# Altium PCB AVR_KBD.PcbDoc
Units mil, origin at the board's own origin, x right, y up, seen from the top; angles counter-clockwise.
Board outline 3200 x 1600 mil, 2 copper layers (Top Layer, Bottom Layer); 45 components, 79 nets, 174 pads, 30 vias.
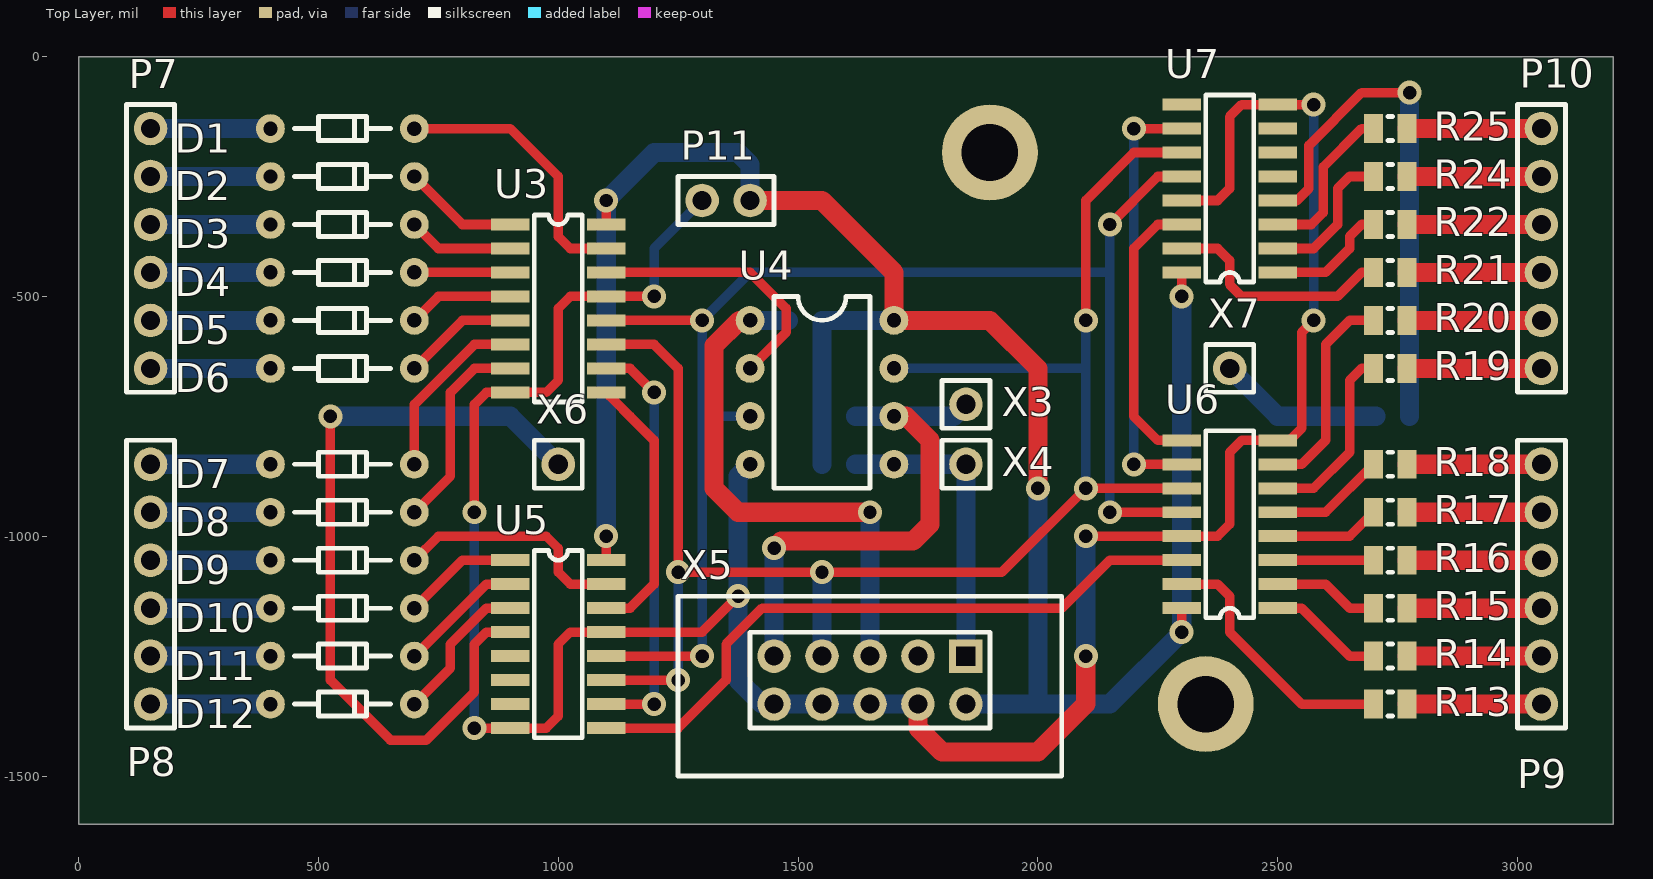
[diagram p0: Top Layer view]
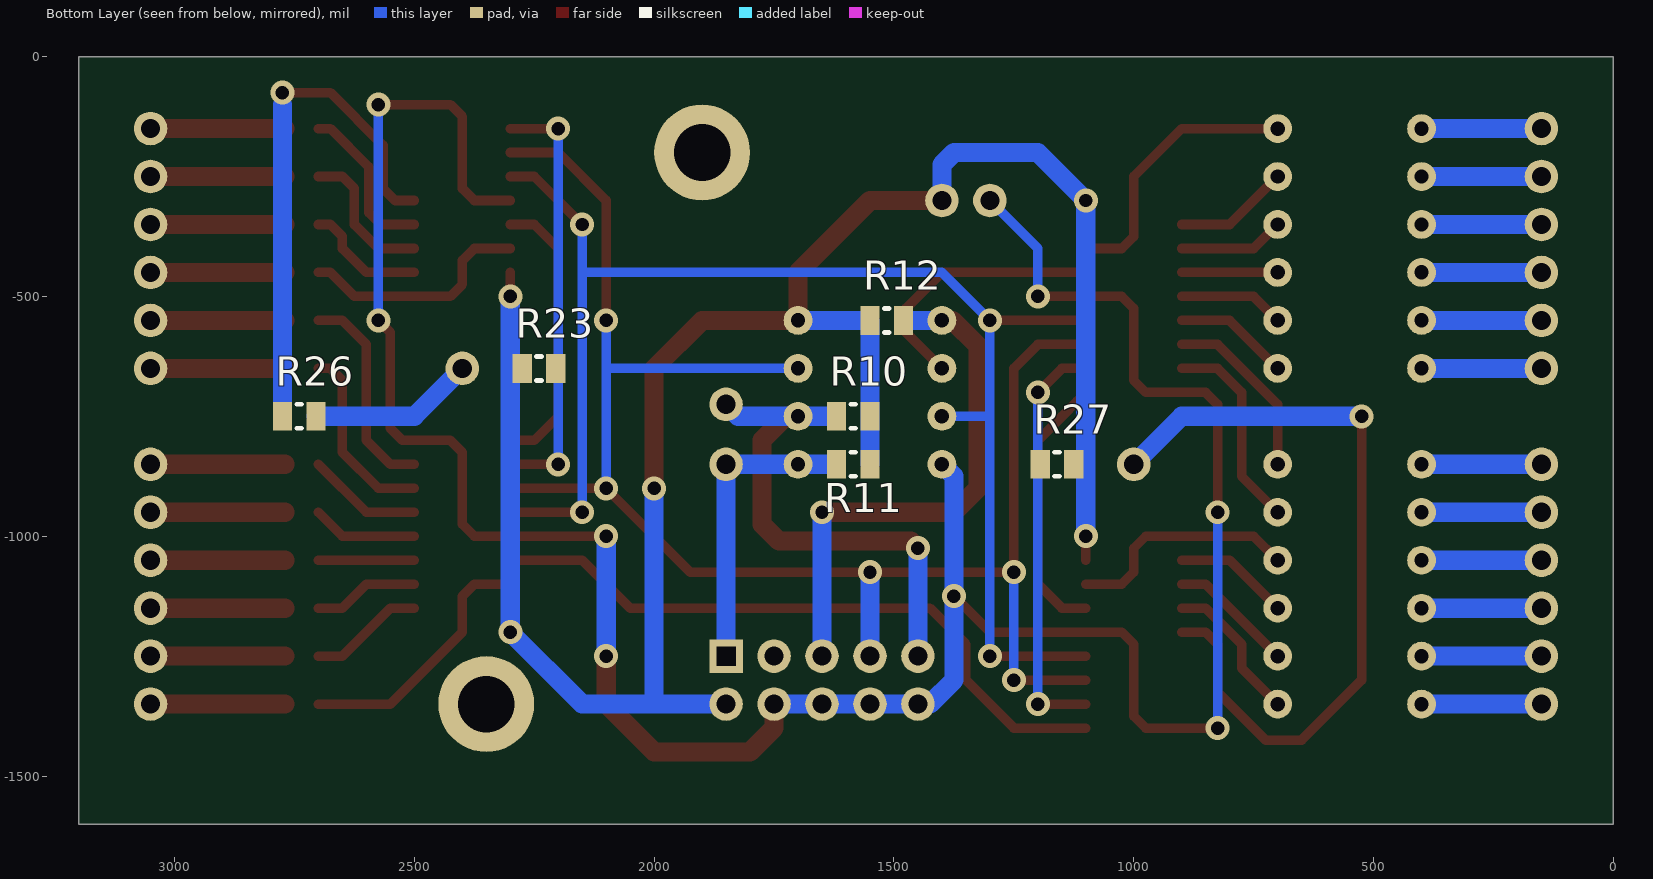
[diagram p1: Bottom Layer view, seen from below]
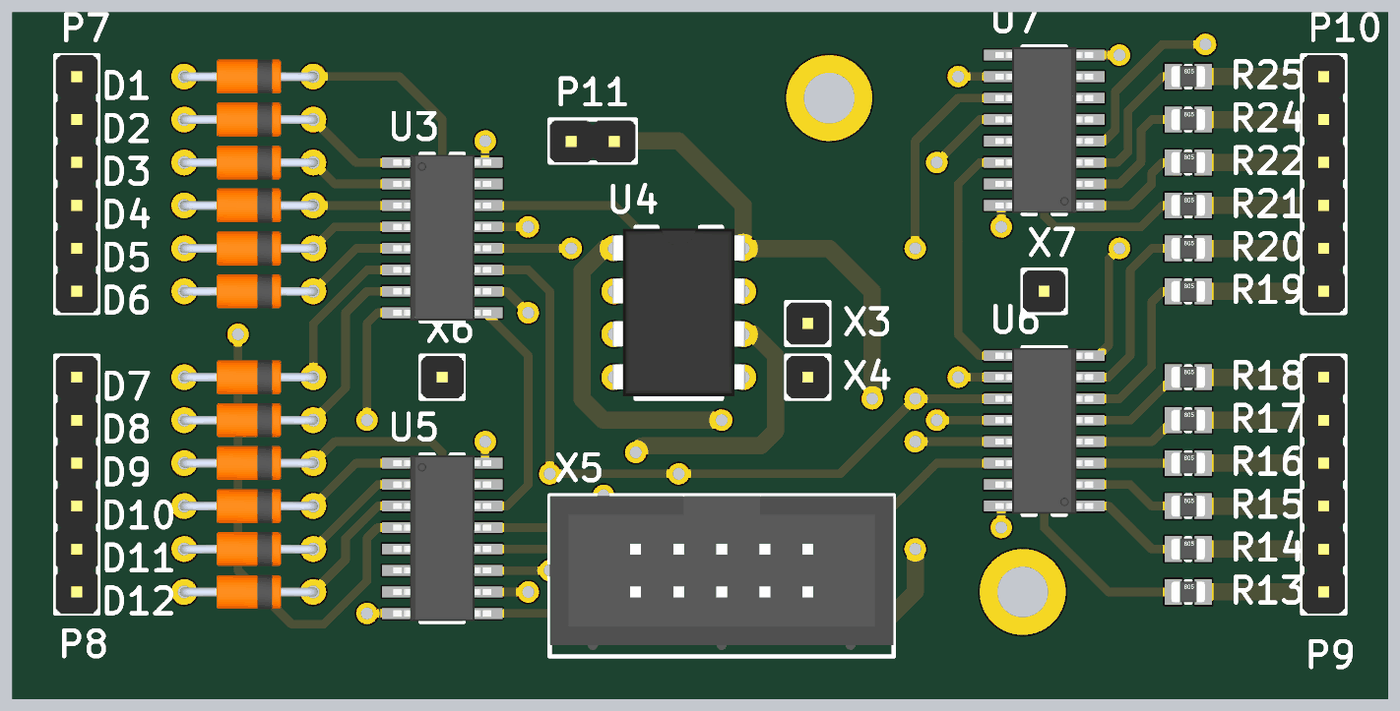
[diagram p2: 3D render of the assembled board from above, using the file's embedded part models]
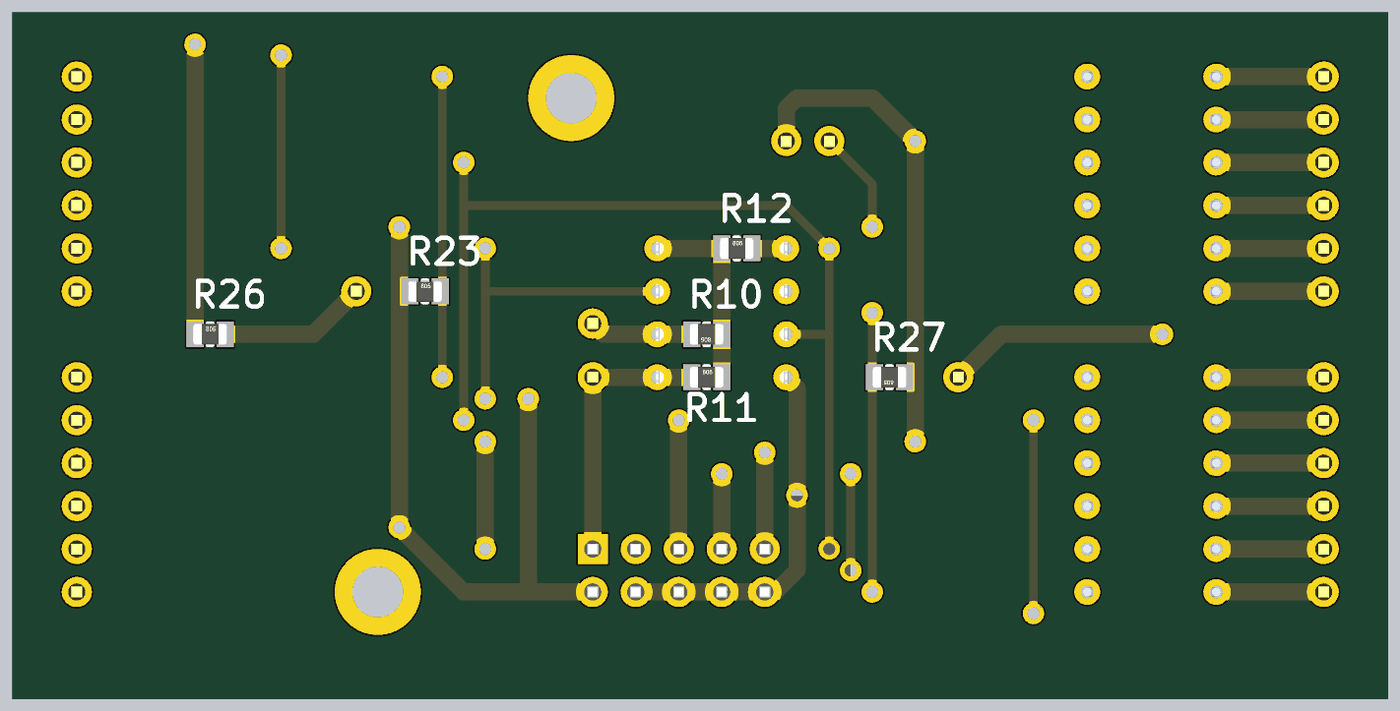
[diagram p3: 3D render of the assembled board from below, using the file's embedded part models]

## Layer stack, top to bottom
Top Solder: solder mask 0.4, Solder Resist, Dk 3.5
Top Layer: signal copper 1.4
Dielectric 1: dielectric 12.6, FR-4, Dk 4.8
Bottom Layer: signal copper 1.4
Bottom Solder: solder mask 0.4, Solder Resist, Dk 3.5

## Board outline
0,-1600 0,0 3200,0 3200,-1600

## Design rules (kind name [scope] priority, off if disabled: settings)
Clearance [All] p1: gap=10
PolygonConnect [All] p1: connectstyle=Relief reliefconductorwidth=10 reliefentries=4 polygonreliefangle="90 Angle" airgapwidth=10
RoomDefinition AVR_KBD [InComponentClass('AVR_KBD')] p1: confinementstyle=ConfineIn formatcopy=TRUE lockcomponents=FALSE outline 50,-1550 3150,-1550 3150,-50 50,-50
RoutingVias [All] p1: holewidth=28 width=50 viastyle="Through Hole" minholewidth=28 minwidth=50 maxholewidth=28 maxwidth=50
SilkToBoardRegionClearance [All] p1 off:
SolderMaskExpansion [All] p1: expansion=4
Width [All] p1: maxlimit=80 minlimit=20 preferedwidth=40
28 further rules are at their usual default settings.

## Components (designator, comment, footprint, x,y, rotation, side; value= is the part's Value field where it differs from the comment)
D1 "Diode" DO35 400,-150 r0 top
D2 "Diode" DO35 400,-250 r0 top
D3 "Diode" DO35 400,-350 r0 top
D4 "Diode" DO35 400,-450 r0 top
D5 "Diode" DO35 400,-550 r0 top
D6 "Diode" DO35 400,-650 r0 top
D7 "Diode" DO35 400,-850 r0 top
D8 "Diode" DO35 400,-950 r0 top
D9 "Diode" DO35 400,-1050 r0 top
D10 "Diode" DO35 400,-1150 r0 top
D11 "Diode" DO35 400,-1250 r0 top
D12 "Diode" DO35 400,-1350 r0 top
P7 "KBD1" SIL-CONN-6 150,-150 r0 top
P8 "KBD2" SIL-CONN-6 150,-850 r0 top
P9 "LEDS1" SIL-CONN-6 3050,-1350 r180 top
P10 "LEDS2" SIL-CONN-6 3050,-650 r180 top
P11 "POWER" SIL-CONN-2 1400,-300 r270 top
R10 "Resistor" 0805_Resistor 1625,-750 r90 bottom
R11 "Resistor" 0805_Resistor 1545,-850 r270 bottom
R12 "Resistor" 0805_Resistor 1475,-550 r270 bottom
R13 "Resistor" 0805_Resistor 2775,-1350 r270 top
R14 "Resistor" 0805_Resistor 2775,-1250 r270 top
R15 "Resistor" 0805_Resistor 2775,-1150 r270 top
R16 "Resistor" 0805_Resistor 2775,-1050 r270 top
R17 "Resistor" 0805_Resistor 2775,-950 r270 top
R18 "Resistor" 0805_Resistor 2775,-850 r270 top
R19 "Resistor" 0805_Resistor 2775,-650 r270 top
R20 "Resistor" 0805_Resistor 2775,-550 r270 top
R21 "Resistor" 0805_Resistor 2775,-450 r270 top
R22 "Resistor" 0805_Resistor 2775,-350 r270 top
R23 "Resistor" 0805_Resistor 2200,-650 r270 bottom
R24 "Resistor" 0805_Resistor 2775,-250 r270 top
R25 "Resistor" 0805_Resistor 2775,-150 r270 top
R26 "Resistor" 0805_Resistor 2700,-750 r270 bottom
R27 "Resistor" 0805_Resistor 1200,-850 r90 bottom
U3 "74HC595" SOIC16 900,-350 r0 top
U4 "ATTINY13A-PU" DIP8 1400,-550 r0 top
U5 "74HC595" SOIC16 900,-1050 r0 top
U6 "74HC595" SOIC16 2500,-1150 r180 top
U7 "74HC595" SOIC16 2500,-450 r180 top
X3 "KBD" SIL-CONN-1 1850,-725 r0 top
X4 "UART" SIL-CONN-1 1850,-850 r0 top
X5 "ISP" DIL-CONN-IDC-10 1850,-1250 r270 top
X6 "MODE" SIL-CONN-1 1000,-850 r0 top
X7 "LED3" SIL-CONN-1 2400,-650 r0 top

## Footprints (in the part's own frame and the unit in brackets; to place one, negate y for a bottom-side part, rotate by r counter-clockwise, add the part's x,y. Pads: shape width x height; smd on the part's side, far side on the other; paste and mask are expansions set on the pad)
0805_Resistor [mil]
  rect 60x40 smd: 1(0,-5) 2(0,-75)
  silkscreen extent -25,-45 25,-35, body extent -25,-79 25,-1, height 31
DIL-CONN-IDC-10 [mil]
  rect 70x70 hole 40 square: 1(0,0)
  round 70 hole 40: 2(100,0) 3(0,-100) 4(100,-100) 5(0,-200) 6(100,-200) 7(0,-300) 8(100,-300) 9(0,-400) 10(100,-400)
  silkscreen extent -125,-600 250,200, body extent -123,-600 235,200, height 366
DIP8 [mil]
  round 60 hole 30: 1(0,0) 2(0,-100) 3(0,-200) 4(0,-300) 5(300,-300) 6(300,-200) 7(300,-100) 8(300,0)
  silkscreen extent 50,-350 250,50, body extent -4,-344 304,46, height 180
DO35 [mil]
  round 60 hole 30: A(0,0) K(300,0)
  silkscreen extent 50,-25 250,25, body extent -10,-40 310,40, height 87
SIL-CONN-1 [mil]
  round 70 hole 40: 1(0,0)
  silkscreen extent -50,-50 50,50, body extent -50,-49 50,49, height 336
SIL-CONN-2 [mil]
  round 70 hole 40: 1(0,0) 2(0,-100)
  silkscreen extent -50,-150 50,50, body extent -48,-150 50,50, height 336
SIL-CONN-6 [mil]
  round 70 hole 40: 1(0,0) 2(0,-100) 3(0,-200) 4(0,-300) 5(0,-400) 6(0,-500)
  silkscreen extent -50,-550 50,50, body extent -49,-550 49,50, height 336
SOIC16 [mil]
  rect 80x25 smd: 1(0,0) 2(0,-50) 3(0,-100) 4(0,-150) 5(0,-200) 6(0,-250) 7(0,-300) 8(0,-350) 9(200,-350) 10(200,-300) 11(200,-250) 12(200,-200) 13(200,-150) 14(200,-100) 15(200,-50) 16(200,0)
  silkscreen extent 50,-370 150,20, body extent -14,-368 214,18, height 69

## Part data
P7 P8 P9 P10: library part SIL-CONN-6
P11: library part SIL-CONN-2
X3 X4 X6 X7: library part SIL-CONN-1
X5: library part DIL-CONN-10

## Free pads (board coordinates)
  round 200 hole 118.11: ""(1900,-200) ""(2350,-1350)

## Via types
v1: diameter 50, hole 28, Top Layer to Bottom Layer, 30 vias

## Nets (pads, with @x,y where several pads share a name; then routed paths per layer and width w, separated by ;. In a path a pad name is that pad's centre, name@x,y a point inside that pad or via, vN(x,y) a via of type N, cw(c..) or ccw(c..) an arc to the next point about the centre after c; other vN are vias at no path point)
DS: U3.14 U4.2 | length 562.1
  Top Layer w20: U3.14 1400,-450 1475,-525 1475,-575 U4.2
ENC1: 
ENC2: 
I2C_SCK: 
I2C_SDA: 
KBD: R10.1 U4.6 X3.1 X5.9 | length 1081.8
  Top Layer w40: v1(1450,-1025) 1465,-1010 1740,-1010 1775,-975 1775,-800 1725,-750 U4.6
  Bottom Layer w40: X5.9 v1(1450,-1025) ; R10.1 U4.6 1825,-750 X3.1
M\R\1: R27.1 U3.10 U5.10 | length 870.7
  Top Layer w20: U5.10 v1(1200,-1350) ; U3.10 1150,-650 v1(1200,-700)
  Bottom Layer w20: v1(1200,-1350) v1(1200,-700)
M\R\2: R23.1 U6.10 U7.10 | length 900
  Top Layer w20: v1(2200,-850) U6.10 ; v1(2200,-150) U7.10
  Bottom Layer w20: v1(2200,-850) v1(2200,-150)
MODE: 
MOSI: R11.2 U4.5 X4.1 X5.1 | length 630
  Bottom Layer w40: R11.2 U4.5 X4.1 X5.1
NetD1_A: D1.A P7.1 | length 250
  Bottom Layer w40: P7.1 D1.A
NetD1_K: D1.K U3.15 | length 576.8
  Top Layer w20: D1.K 900,-150 1000,-250 1000,-375 1025,-400 U3.15
NetD2_A: D2.A P7.2 | length 250
  Bottom Layer w40: P7.2 D2.A
NetD2_K: D2.K U3.1 | length 241.4
  Top Layer w20: D2.K 800,-350 U3.1
NetD3_A: D3.A P7.3 | length 250
  Bottom Layer w40: P7.3 D3.A
NetD3_K: D3.K U3.2 | length 220.7
  Top Layer w20: D3.K 750,-400 U3.2
NetD4_A: D4.A P7.4 | length 250
  Bottom Layer w40: P7.4 D4.A
NetD4_K: D4.K U3.3 | length 200
  Top Layer w20: D4.K U3.3
NetD5_A: D5.A P7.5 | length 250
  Bottom Layer w40: P7.5 D5.A
NetD5_K: D5.K U3.4 | length 220.7
  Top Layer w20: D5.K 750,-500 U3.4
NetD6_A: D6.A P7.6 | length 250
  Bottom Layer w40: P7.6 D6.A
NetD6_K: D6.K U3.5 | length 241.4
  Top Layer w20: D6.K 800,-550 U3.5
NetD7_A: D7.A P8.1 | length 250
  Bottom Layer w40: P8.1 D7.A
NetD7_K: D7.K U3.6 | length 376.8
  Top Layer w20: D7.K 700,-725 825,-600 U3.6
NetD8_A: D8.A P8.2 | length 250
  Bottom Layer w40: P8.2 D8.A
NetD8_K: D8.K U3.7 | length 426.8
  Top Layer w20: D8.K 775,-875 775,-700 825,-650 U3.7
NetD9_A: D9.A P8.3 | length 250
  Bottom Layer w40: P8.3 D9.A
NetD9_K: D9.K U5.15 | length 491.4
  Top Layer w20: D9.K 750,-1000 975,-1000 1000,-1025 1000,-1075 1025,-1100 U5.15
NetD10_A: D10.A P8.4 | length 250
  Bottom Layer w40: P8.4 D10.A
NetD10_K: D10.K U5.1 | length 241.4
  Top Layer w20: D10.K 800,-1050 U5.1
NetD11_A: D11.A P8.5 | length 250
  Bottom Layer w40: P8.5 D11.A
NetD11_K: D11.K U5.2 | length 262.1
  Top Layer w20: D11.K 850,-1100 U5.2
NetD12_A: D12.A P8.6 | length 250
  Bottom Layer w40: P8.6 D12.A
NetD12_K: D12.K U5.3 | length 312.1
  Top Layer w20: D12.K 775,-1275 775,-1225 850,-1150 U5.3
NetP1_1: 
NetP1_2: 
NetP1_3: 
NetP1_4: 
NetP1_5: 
NetP1_6: 
NetP9_1: P9.1 R13.1 | length 280
  Top Layer w40: R13.1 P9.1
NetP9_2: P9.2 R14.1 | length 280
  Top Layer w40: R14.1 P9.2
NetP9_3: P9.3 R15.1 | length 280
  Top Layer w40: R15.1 P9.3
NetP9_4: P9.4 R16.1 | length 280
  Top Layer w40: R16.1 P9.4
NetP9_5: P9.5 R17.1 | length 280
  Top Layer w40: R17.1 P9.5
NetP9_6: P9.6 R18.1 | length 280
  Top Layer w40: R18.1 P9.6
NetP10_1: P10.1 R19.1 | length 280
  Top Layer w40: R19.1 P10.1
NetP10_2: P10.2 R20.1 | length 280
  Top Layer w40: R20.1 P10.2
NetP10_3: P10.3 R21.1 | length 280
  Top Layer w40: R21.1 P10.3
NetP10_4: P10.4 R22.1 | length 280
  Top Layer w40: R22.1 P10.4
NetP10_5: P10.5 R24.1 | length 280
  Top Layer w40: R24.1 P10.5
NetP10_6: P10.6 R25.1 | length 280
  Top Layer w40: R25.1 P10.6
NetR13_2: R13.2 U6.15 | length 547.5
  Top Layer w20: U6.15 2375,-1100 2400,-1125 2400,-1200 2550,-1350 R13.2
NetR14_2: R14.2 U6.1 | length 241.4
  Top Layer w20: U6.1 2550,-1150 2650,-1250 R14.2
NetR15_2: R15.2 U6.2 | length 220.7
  Top Layer w20: U6.2 2600,-1100 2650,-1150 R15.2
NetR16_2: R16.2 U6.3 | length 200
  Top Layer w20: U6.3 R16.2
NetR17_2: R17.2 U6.4 | length 220.7
  Top Layer w20: U6.4 2650,-1000 R17.2
NetR18_2: R18.2 U6.5 | length 241.4
  Top Layer w20: U6.5 2600,-950 R18.2
NetR19_2: R19.2 U6.6 | length 391.4
  Top Layer w20: U6.6 2575,-900 2650,-825 2650,-675 2675,-650 R19.2
NetR20_2: R20.2 U6.7 | length 441.4
  Top Layer w20: U6.7 2550,-850 2600,-800 2600,-600 2650,-550 R20.2
NetR21_2: R21.2 U7.15 | length 491.4
  Top Layer w20: U7.15 2375,-400 2400,-425 2400,-475 2425,-500 2625,-500 2675,-450 R21.2
NetR22_2: R22.2 U7.1 | length 256.1
  Top Layer w20: U7.1 2600,-450 2650,-400 2650,-375 2675,-350 R22.2
NetR24_2: R24.2 U7.2 | length 306.1
  Top Layer w20: U7.2 2575,-400 2625,-350 2625,-275 2650,-250 R24.2
NetR25_2: R25.2 U7.3 | length 338.5
  Top Layer w20: U7.3 2570,-350 2595,-325 2595,-230 2675,-150 R25.2
NetR26_1: R26.1 X7.1 | length 346.4
  Bottom Layer w40: X7.1 2500,-750 R26.1
NetR26_2: R26.2 U7.4 | length 1070.9
  Top Layer w20: U7.4 2540,-300 2565,-275 2565,-185 2675,-75 v1(2775,-75)
  Bottom Layer w40: R26.2 2775,-100
NetU3_9: U3.9 U5.14 | length 562.1
  Top Layer w20: U5.14 1150,-1150 1200,-1100 1200,-800 1150,-750 1118.64,-718.64 U3.9
NetU5_4: U5.4 X6.1 | length 1645
  Top Layer w20: v1(525,-750) 525,-1300 650,-1425 725,-1425 825,-1325 825,-1225 850,-1200 U5.4
  Bottom Layer w40: v1(525,-750) 900,-750 X6.1
NetU5_9: U5.9 U6.14 | length 1388.9
  Top Layer w20: U5.9 1250,-1400 1350,-1300 1350,-1225 1425,-1150 2050,-1150 2150,-1050 U6.14
NetU6_9: U6.9 U7.14 | length 591.4
  Top Layer w20: U6.9 2250,-800 2200,-750 2200,-400 2250,-350 U7.14
O\E\: P11.2 U3.8 U3.13 U4.4 U5.8 U5.13 U6.8 U6.13 U7.8 U7.13 X5.4 X5.6 X5.8 X5.10 | length 5654.6
  Top Layer w20: v1(825,-1400) U5.8 975,-1400 1000,-1375 1000,-1225 1025,-1200 U5.13 1300,-1200 v1(1375,-1125) ; v1(825,-950) 825,-725 850,-700 U3.8 975,-700 1000,-675 1000,-525 1025,-500 U3.13 v1(1200,-500) ; v1(2100,-1000) U6.13 2375,-1000 2400,-975 2400,-825 2425,-800 U6.8 2525,-800 2550,-775 2550,-575 v1(2575,-550) ; U7.13 2375,-300 2400,-275 2400,-125 2425,-100 U7.8 v1(2575,-100)
  Top Layer w40: X5.4 1750,-1400 1800,-1450 2000,-1450 2100,-1350 v1(2100,-1250)
  Bottom Layer w20: v1(825,-1400) v1(825,-950) ; v1(1200,-500) 1200,-400 P11.2 ; v1(2575,-550) v1(2575,-100)
  Bottom Layer w40: U4.4 1375,-875 1375,-1300 1425,-1350 X5.10 X5.8 X5.6 X5.4 ; v1(2100,-1250) v1(2100,-1000)
R\E\S\E\T\: R12.1 U4.1 X5.5 | length 1119.8
  Top Layer w40: U4.1 1377.78,-550 1325,-602.78 1325,-900 1375,-950 v1(1650,-950)
  Bottom Layer w40: U4.1 R12.1 ; X5.5 v1(1650,-950)
RST: 
SCK: U3.11 U4.7 U5.11 U6.11 U7.11 X5.7 | length 3509.6
  Top Layer w20: U5.11 v1(1250,-1300) ; U3.11 1200,-600 1250,-650 v1(1250,-1075) v1(1550,-1075) 1925,-1075 v1(2100,-900) U6.11 ; v1(2100,-550) 2100,-300 2200,-200 U7.11
  Bottom Layer w20: v1(1250,-1300) v1(1250,-1075) ; U4.7 2100,-650 ; v1(2100,-900) 2100,-650 ; v1(2100,-550) 2100,-650
  Bottom Layer w40: X5.7 v1(1550,-1075)
ST: U3.12 U4.3 U5.12 U6.12 U7.12 | length 3032.8
  Top Layer w20: U5.12 v1(1300,-1250) ; U3.12 v1(1300,-550) ; v1(2150,-950) U6.12 ; v1(2150,-350) 2250,-250 U7.12
  Bottom Layer w20: v1(1300,-1250) 1300,-750 ; U4.3 1300,-750 ; v1(2150,-950) v1(2150,-350) ; 2150,-450 1400,-450 v1(1300,-550) 1300,-750
UART_RX: 
VCC: P11.1 R10.2 R11.1 R12.2 R23.2 R27.2 U3.16 U4.8 U5.16 U6.16 U7.16 X5.2 | length 4492.5
  Top Layer w20: U5.16 v1(1100,-1000) ; U3.16 v1(1100,-300) ; v1(2300,-1200) U6.16 ; v1(2300,-500) U7.16
  Top Layer w40: P11.1 1550,-300 1700,-450 U4.8 1900,-550 2000,-650 v1(2000,-900)
  Bottom Layer w40: v1(1100,-1000) v1(1100,-300) 1200,-200 1375,-200 1400,-225 P11.1 ; R11.1 R10.2 R12.2 U4.8 ; X5.2 2000,-1350 ; v1(2000,-900) 2000,-1350 ; v1(2300,-500) v1(2300,-1200) 2150,-1350 2000,-1350
X1: 
X2: 
pads on no net: U5.5 U5.6 U5.7 U7.5 U7.6 U7.7 U7.9 X5.3

## Silkscreen, mask and mechanical layers (free items; w line width, h text height)
Mechanical 1:
  the board outline again, w10